# Altium PCB Tigershark 3D R1.4.PcbDoc (part 2 of 4)
Units mil, origin at the board's own origin, x right, y up, seen from the top; angles counter-clockwise.
Board outline 5500 x 4400 mil, 4 copper layers (Top Layer, Groun Plane, Power Plane, Bottom Layer); 262 components, 257 nets, 980 pads, 806 vias.
Unrouted connection lines stored in the file: 9.
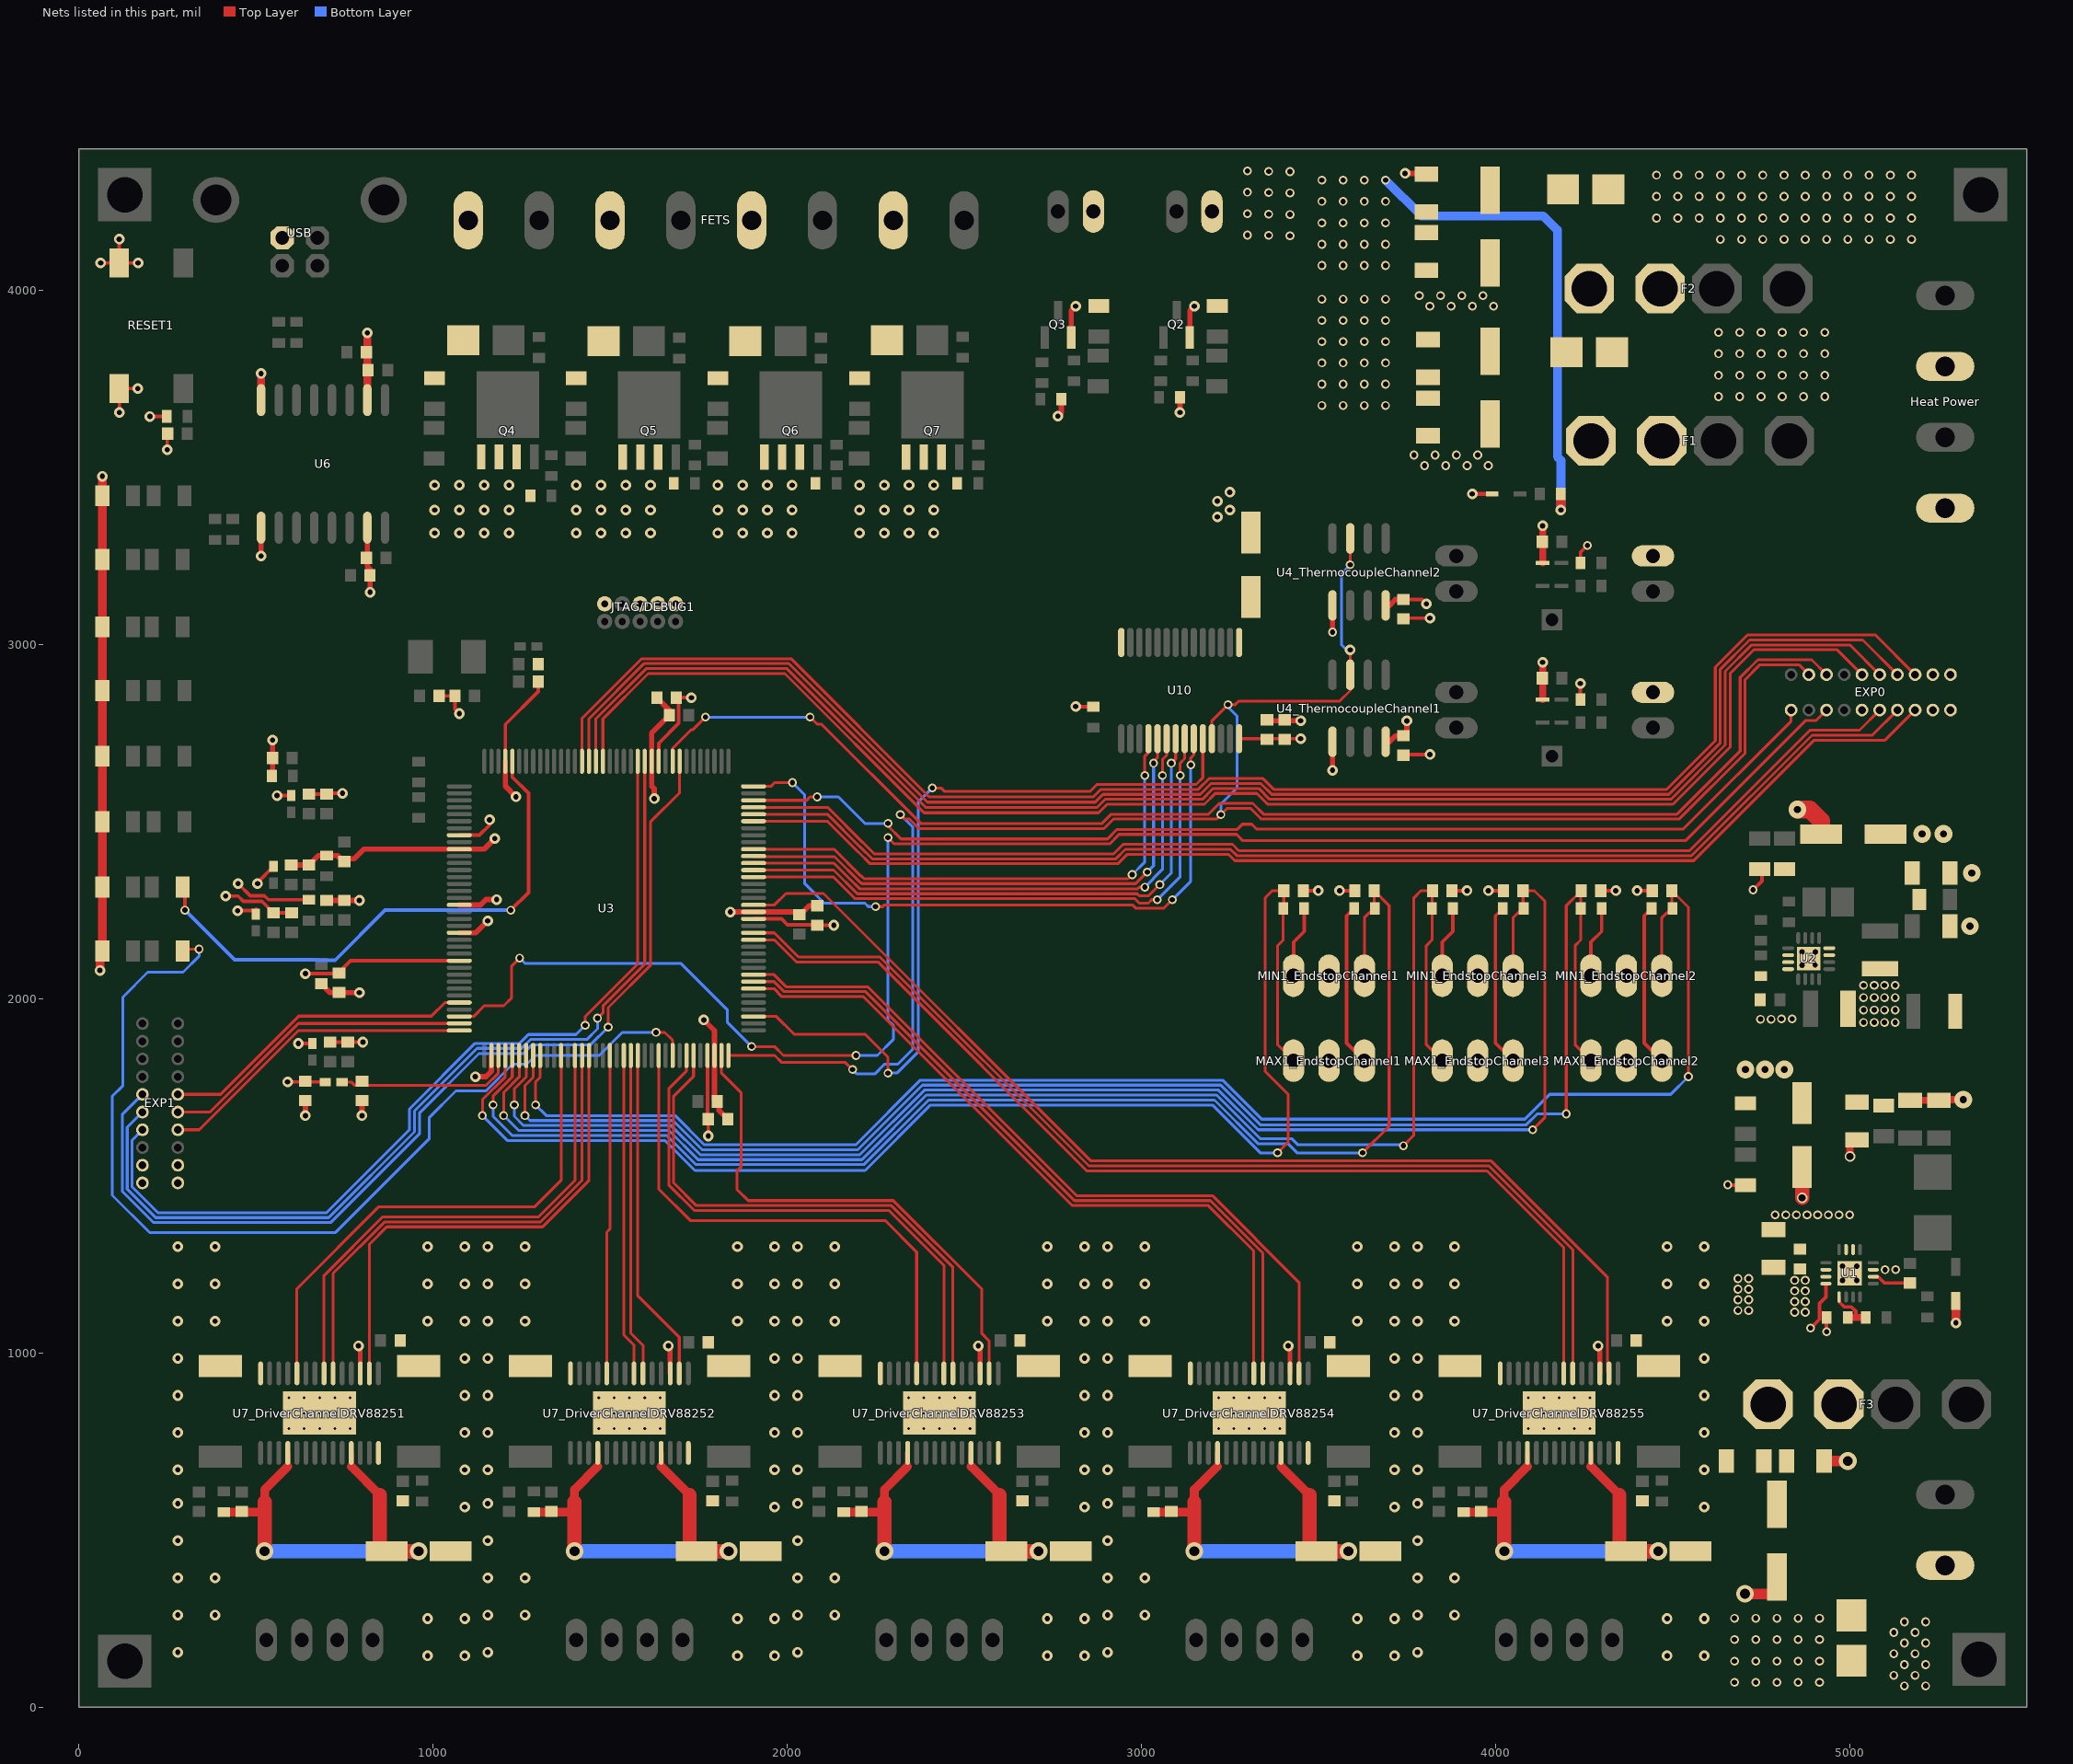
[diagram p4: the nets of this part, all layers, seen from the top]

## Part data
C1_EndstopChannel1 C1_EndstopChannel2 C1_EndstopChannel3 C2_EndstopChannel1 C2_EndstopChannel2 C2_EndstopChannel3 C4 C5 C6 C9 C13 C14 C15 C18 C19 C22 C23 C24 C25 C26 C27 C28 C29 C32 C33 C34 C35 C36 C37 C38 C39 C40 C41 C42 C43 C44 C45 C46 C47 C48 C52 C53 C54 C55 C56 C57 C58 C59 C60 C61 C64 C65 C66_DriverChannelDRV88251 C66_DriverChannelDRV88252 C66_DriverChannelDRV88253 C66_DriverChannelDRV88254 C66_DriverChannelDRV88255 C68_DriverChannelDRV88251 C68_DriverChannelDRV88252 C68_DriverChannelDRV88253 C68_DriverChannelDRV88254 C68_DriverChannelDRV88255 C71_DriverChannelDRV88251 C71_DriverChannelDRV88252 C71_DriverChannelDRV88253 C71_DriverChannelDRV88254 C71_DriverChannelDRV88255 C73 C75_DriverChannelDRV88251 C75_DriverChannelDRV88252 C75_DriverChannelDRV88253 C75_DriverChannelDRV88254 C75_DriverChannelDRV88255: library part "Cap Semi", "Capacitor (Semiconductor SIM Model)"
C3 C12 C16 C69_DriverChannelDRV88251 C69_DriverChannelDRV88252 C69_DriverChannelDRV88253 C69_DriverChannelDRV88254 C69_DriverChannelDRV88255: library part "Cap Pol1", "Polarized Capacitor (Radial)"
C7 C8 C10 C11 C30_ThermistorChannel1 C30_ThermistorChannel2 C31_ThermocoupleChannel1 C31_ThermocoupleChannel2 C63: "Capacitor (Semiconductor SIM Model)"
C17: library part Cap2, "Capacitor"
D1: library part "D Zener", "Zener Diode"
D2 D3 D7 D9 D20 D21 D22 D23 D24 D25: "Typical RED, GREEN, YELLOW, AMBER GaAs LED"
D4 D6 D8 D12 D15 D17 D19: library part "D Schottky", "Schottky Diode"
D5: "Default Diode"
D10 D11 D13 D14 D16 D18: "Typical RED GaAs LED"
D11_ThermistorChannel1 D11_ThermistorChannel2 D12_ThermistorChannel1 D12_ThermistorChannel2: "High Conductance Fast Diode"
F1 F2 F3 F4: library part "Fuse 1", "Fuse"
FB2 FB3 L2: library part Inductor, "Inductor"
FETS: library part con-phoenix-508
"Heat Power": library part con-phoenix-508_4
M1_DriverChannelDRV88251 M1_DriverChannelDRV88252 M1_DriverChannelDRV88253 M1_DriverChannelDRV88254 M1_DriverChannelDRV88255: library part "Molex 0705430003 Alt", "Molex 4 Pin Clip Connector"
MAX1_EndstopChannel1 MAX1_EndstopChannel2 MAX1_EndstopChannel3 MIN1_EndstopChannel1 MIN1_EndstopChannel2 MIN1_EndstopChannel3: library part "Molex Endstop"
"Motor Power": library part con-phoenix-508_2
Q2 Q3 Q4 Q5 Q6 Q7: "N-Channel MOSFET"
R1 R7 R8 R9 R10 R11 R13_ThermistorChannel1 R13_ThermistorChannel2 R14_ThermistorChannel1 R14_ThermistorChannel2 R17 R21: "Resistor"
R2_EndstopChannel1 R2_EndstopChannel2 R2_EndstopChannel3 R3_EndstopChannel1 R3_EndstopChannel2 R3_EndstopChannel3 R4 R5 R6 R12 R13 R14 R15 R16 R18 R19 R20 R22 R23 R28 R29 R30_DriverChannelDRV88251 R30_DriverChannelDRV88252 R30_DriverChannelDRV88253 R30_DriverChannelDRV88254 R30_DriverChannelDRV88255 R31_DriverChannelDRV88251 R31_DriverChannelDRV88252 R31_DriverChannelDRV88253 R31_DriverChannelDRV88254 R31_DriverChannelDRV88255 R32_DriverChannelDRV88251 R32_DriverChannelDRV88252 R32_DriverChannelDRV88253 R32_DriverChannelDRV88254 R32_DriverChannelDRV88255 R33_DriverChannelDRV88251 R33_DriverChannelDRV88252 R33_DriverChannelDRV88253 R33_DriverChannelDRV88254 R33_DriverChannelDRV88255 R34 R35 R36 R37 R38 R39 R40 R45 R46 R47 R48 R52 R55 R56 R57 R58 R59 R60 R61 R62 R63 R64 R65 R66 R67 R68 R69 R70 R71: library part Res3, "Resistor"
THM_TP1_ThermistorChannel1 THM_TP1_ThermistorChannel2: library part Socket, "Socket"
U2: "Buck Step Down Regulator with 3 to 17 V Input and 3.3 V Output, -40 to 85 degC, 16-Pin QFN (RGT), Green (RoHS & no Sb/Br)"
U4_ThermocoupleChannel1 U4_ThermocoupleChannel2: "Cold Junction Compensated Thermocouple to Digital Converter, 14 Bits Temperature Resolution, -40 to 125 degC, 8-Pin SOIC (S8+4), Pb-Free"
U6: "USB Opto Isolator"
U7_DriverChannelDRV88251 U7_DriverChannelDRV88252 U7_DriverChannelDRV88253 U7_DriverChannelDRV88254 U7_DriverChannelDRV88255: "DRV8825 Ti Stepper Driver"
U10: library part TPIC46IO1
X2: library part XTAL, "Crystal Oscillator"

## Free pads (board coordinates)
  rect 150x150 hole 100: ""(130,130) ""(130,4270) ""(5365,135) ""(5370,4270)

## Via types
v1: diameter 25, hole 15, Top Layer to Bottom Layer, 373 vias
v2: diameter 30, hole 15, Top Layer to Bottom Layer, 334 vias
v3: diameter 19.68, hole 7.87, Top Layer to Bottom Layer, 75 vias
v4: diameter 50, hole 28, Top Layer to Bottom Layer, 12 vias
v5: diameter 50, hole 20, Top Layer to Bottom Layer, 9 vias
v6: diameter 30, hole 20, Top Layer to Bottom Layer, 3 vias

## Nets (pads, with @x,y where several pads share a name; then routed paths per layer and width w, separated by ;. In a path a pad name is that pad's centre, name@x,y a point inside that pad or via, vN(x,y) a via of type N, cw(c..) or ccw(c..) an arc to the next point about the centre after c; other vN are vias at no path point)
3.3VCC: C23.1 C25.2 C26.1 C31_ThermocoupleChannel1.2 C31_ThermocoupleChannel2.2 C35.1 C45.2 C46.2 C47.2 C48.2 C64.2 EXP0.9 EXP0.12 EXP1.9 EXP1.12 FB3.2 FB5.1 FB6.1 FB7.1 FB8.1 FB9.1 JTAG/DEBUG1.1@1685,3115 MAX1_EndstopChannel1.3 MAX1_EndstopChannel2.3 MAX1_EndstopChannel3.3 MIN1_EndstopChannel1.3 MIN1_EndstopChannel2.3 MIN1_EndstopChannel3.3 R2_EndstopChannel1.1 R2_EndstopChannel2.1 R2_EndstopChannel3.1 R3_EndstopChannel1.1 R3_EndstopChannel2.1 R3_EndstopChannel3.1 R6.2 R11.2 R13_ThermistorChannel1.2 R13_ThermistorChannel2.2 R17.1 R21.2 U3.11 U3.62 U3.105 U3.125 U4_ThermocoupleChannel1.4 U4_ThermocoupleChannel2.4 U7_DriverChannelDRV88251.17 U7_DriverChannelDRV88252.17 U7_DriverChannelDRV88253.17 U7_DriverChannelDRV88254.17 U7_DriverChannelDRV88255.17 U10.14 | length 4673.6
  Top Layer w10: v2(201,3644) R21.2@248.47,3644 ; v2(449,2248.62) 501.22,2248.62 FB5.1@501.22,2252.8 ; v2(450,2325) 484,2291 524.19,2291 535.66,2279.53 R6.2@650,2279.53 ; v2(505,2325) 505,2328.62 FB7.1@550,2373.62 ; v2(560,2573.62) FB8.1@600,2573.62 ; v2(590,1765) FB9.1@696.38,1765 ; v2(620,1873.62) FB6.1@660,1873.62 ; v2(640,2070.81) 715,2070.81 ; C48.2@735,2072.56 735,2075 767.36,2107.36 U3.62@1074.65,2107.36 ; U3.11@1637.64,2670.35 1637.64,2721.18 1694.19,2777.73 1694.19,2843.37 C47.2@1687.56,2850 v2(1730,2850) ; C45.2@1775.43,1660 U3.105@1775.43,1839.65 ; v2(1777.44,1612.56) C45.2@1777.44,1660 ; U3.125@1905.35,2225.47 1984.53,2225.47 2000.81,2209.19 2083.25,2209.19 C46.2@2085,2207.44 v2(2132.44,2207.44) ; v2(2815,2825) 2815.47,2824.53 R17.1@2865,2824.53 ; U10.14@3276.34,2734.17 v2(3450,2734.17) ; MIN1_EndstopChannel1.3@3430,2065 3430,2160 3460,2190 R3_EndstopChannel1.1@3460,2255 ; R2_EndstopChannel1.1@3600.95,2255 3580,2234.06 3580,1875 MAX1_EndstopChannel1.3@3630,1825 ; C31_ThermocoupleChannel2.2@3755,3127.05 3792.95,3127.05 v2(3805,3115) ; MIN1_EndstopChannel3.3@3850,2065 3850,2160 3880,2190 R3_EndstopChannel3.1@3880,2255 ; R2_EndstopChannel3.1@4020.95,2255 4000,2234.06 4000,1875 MAX1_EndstopChannel3.3@4050,1825 ; v2(4240,2890) 4240,2845.47 R13_ThermistorChannel1.2@4240.47,2845 ; R13_ThermistorChannel2.2@4240.47,3230 4240.47,3260.47 v1(4260,3280) ; MIN1_EndstopChannel2.3@4270,2065 4270,2160 4300,2190 R3_EndstopChannel2.1@4300,2255 ; R2_EndstopChannel2.1@4440.95,2255 4420,2234.06 4420,1875 MAX1_EndstopChannel2.3@4470,1825
  Top Layer w14: v2(790,1020) 795,1020 U7_DriverChannelDRV88251.17@795,942.36 ; v2(1665,1020) 1670,1020 U7_DriverChannelDRV88252.17@1670,942.36 ; v2(2540,1020) 2545,1020 U7_DriverChannelDRV88253.17@2545,942.36 ; v2(3415,1020) 3420,1020 U7_DriverChannelDRV88254.17@3420,942.36 ; v2(4290,1020) 4295,1020 U7_DriverChannelDRV88255.17@4295,942.36
  Top Layer w15: U4_ThermocoupleChannel1.4@3690,2725.51 3701.02,2725.51 3717.56,2742.05 3750,2742.05 v2(3750,2784.49) ; U4_ThermocoupleChannel2.4@3690,3110.51 3701.02,3110.51 3717.56,3127.05 C31_ThermocoupleChannel2.2@3750,3127.05
  other v5: 5205,2465 5265,2465
+5VCC: C9.1 C34.1 F4.2 FB2.2 R8.2
  other v5: 4706,1800 4761,1800 4816,1800
+12VCC1: C10.2 C11.2 C16.1 C18.2 C19.2 C66_DriverChannelDRV88251.1 C66_DriverChannelDRV88252.1 C66_DriverChannelDRV88253.1 C66_DriverChannelDRV88254.1 C66_DriverChannelDRV88255.1 C69_DriverChannelDRV88251.1 C69_DriverChannelDRV88252.1 C69_DriverChannelDRV88253.1 C69_DriverChannelDRV88254.1 C69_DriverChannelDRV88255.1 D8.2 F3.2 R30_DriverChannelDRV88251.1 R30_DriverChannelDRV88252.1 R30_DriverChannelDRV88253.1 R30_DriverChannelDRV88254.1 R30_DriverChannelDRV88255.1 U1.2 U1.3 U1.11 U7_DriverChannelDRV88251.4 U7_DriverChannelDRV88251.11 U7_DriverChannelDRV88252.4 U7_DriverChannelDRV88252.11 U7_DriverChannelDRV88253.4 U7_DriverChannelDRV88253.11 U7_DriverChannelDRV88254.4 U7_DriverChannelDRV88254.11 U7_DriverChannelDRV88255.4 U7_DriverChannelDRV88255.11 | length 6255.1
  Top Layer w14: 590.43,679.43 U7_DriverChannelDRV88251.4@590.43,717.8 ; 769.57,679.43 U7_DriverChannelDRV88251.11@769.57,717.8 ; 1465.43,679.43 U7_DriverChannelDRV88252.4@1465.43,717.8 ; 1644.57,679.43 U7_DriverChannelDRV88252.11@1644.57,717.8 ; 2340.43,679.43 U7_DriverChannelDRV88253.4@2340.43,717.8 ; 2519.57,679.43 U7_DriverChannelDRV88253.11@2519.57,717.8 ; 3215.43,679.43 U7_DriverChannelDRV88254.4@3215.43,717.8 ; 3394.57,679.43 U7_DriverChannelDRV88254.11@3394.57,717.8 ; 4090.43,679.43 U7_DriverChannelDRV88255.4@4090.43,717.8 ; 4269.57,679.43 U7_DriverChannelDRV88255.11@4269.57,717.8
  Top Layer w25: R30_DriverChannelDRV88251.1@410,550.47 525,550.47 ; 525,580 525,614 590.43,679.43 ; 769.57,679.43 850,599 ; R30_DriverChannelDRV88252.1@1285,550.47 1400,550.47 ; 1400,580 1400,614 1465.43,679.43 ; 1644.57,679.43 1725,599 ; R30_DriverChannelDRV88253.1@2160,550.47 2275,550.47 ; 2275,580 2275,614 2340.43,679.43 ; 2519.57,679.43 2600,599 ; R30_DriverChannelDRV88254.1@3035,550.47 3150,550.47 ; 3150,580 3150,614 3215.43,679.43 ; 3394.57,679.43 3475,599 ; R30_DriverChannelDRV88255.1@3910,550.47 4025,550.47 ; 4025,580 4025,614 4090.43,679.43 ; 4269.57,679.43 4350,599
  Top Layer w40: v4(525,440) 525,580 ; C69_DriverChannelDRV88251.1@850,440.55 850,599 ; C69_DriverChannelDRV88251.1@869.45,440 v4(960,440) ; v4(1400,440) 1400,580 ; C69_DriverChannelDRV88252.1@1725,440.55 1725,599 ; C69_DriverChannelDRV88252.1@1744.45,440 v4(1835,440) ; v4(2275,440) 2275,580 ; C69_DriverChannelDRV88253.1@2600,440.55 2600,599 ; C69_DriverChannelDRV88253.1@2619.45,440 v4(2710,440) ; v4(3150,440) 3150,580 ; C69_DriverChannelDRV88254.1@3475,440.55 3475,599 ; C69_DriverChannelDRV88254.1@3494.45,440 v4(3585,440) ; v4(4025,440) 4025,580 ; C69_DriverChannelDRV88255.1@4350,440.55 4350,599 ; C69_DriverChannelDRV88255.1@4369.45,440 v4(4460,440)
  Bottom Layer w40: v4@530,440 v4(960,440) ; v4@1405,440 v4(1835,440) ; v4@2280,440 v4(2710,440) ; v4@3155,440 v4(3585,440) ; v4@4030,440 v4(4460,440)
  other v1: 4675,70 4735,70 4795,70 4855,70 4915,70 4675,130 4735,130 4795,130 4855,130 4915,130 4675,191 4735,191 4795,191 4855,191 4915,191 4675,251 4735,251 4795,251 4855,251 4915,251 4845,1115 4875,1115 4685,1120 4715,1120 4845,1145 4875,1145 4685,1150 4715,1150 4845,1175 4875,1175 4685,1180 4715,1180 4845,1205 4875,1205 4685,1210 4715,1210 5100,1234.84 5130,1235
+12VCC2: C3.1 C5.2 C6.2 C17.1 D4.2 D15.2 D17.2 D19.2 F2.2 FAN-1.1 FAN-2.1 FETS.3 FETS.5 FETS.7 R1.2 R13.1 R47.1 R60.2 R64.2 R68.2 U10.28 | length 1382.7
  Top Layer w8: R1.2@4184.53,3425 R1.2@4185,3424.53
  Top Layer w25: v2(4185,3380) R1.2@4185,3424.53
  Bottom Layer w25: v1(3690,4311) 3791,4210 4135,4210 4175,4170 4175,3530 4185,3520 v2(4185,3380)
  other v1: 3510,4070 3570,4070 3630,4070 3690,4070 3510,4130 3570,4130 3630,4130 3690,4130 3420,4154 3360,4155 3300,4156 3510,4190 3570,4190 3630,4190 3690,4190 3420,4214 3360,4215 3300,4216 3510,4251 3570,4251 3630,4251 3690,4251 3420,4275 3360,4276 3300,4277 3510,4311 3570,4311 3630,4311 3420,4335 3360,4336 3300,4337
+12VCC3: C12.1 C14.2 C15.2 D6.2 D12.2 F1.2 FETS.1 R56.2
  other v1: 3510,3675 3570,3675 3630,3675 3690,3675 3510,3735 3570,3735 3630,3735 3690,3735 3510,3795 3570,3795 3630,3795 3690,3795 3510,3855 3570,3855 3630,3855 3690,3855 3510,3915 3570,3915 3630,3915 3690,3915 3510,3975 3570,3975 3630,3975 3690,3975
AVREF: C65.2 FB9.2 U3.75 | length 509.5
  Top Layer w8: FB9.2@743.62,1765 770,1765 780,1755 1149.75,1755 1184.88,1790.13 U3.75@1184.88,1839.65
BED_PWM: U3.144 U10.9 | length 1973.4
  Top Layer w8: U3.144@1905.35,2599.49 1954.49,2599.49 1965,2610 v1(2015,2610) ; v1(2250,2260) 2270,2260 2275,2265 2975,2265 2984,2256 3064.14,2256 v1(3087.78,2279.64) ; v1(3140,2660) 3140,2680 3148.39,2688.39 U10.9@3148.39,2734.17
  Bottom Layer w8: v1(2015,2610) 2050,2575 2050,2325 2105,2270 2220,2270 2230,2260 v1(2250,2260) ; v1(3087.78,2279.64) 3140,2331.86 v1(3140,2660)
BST: C7.2 U1.10 | length 110.4
  Top Layer w10: U1.10@5066.93,1215.16 5080.59,1215.16 5098.3,1197.44 C7.2@5170,1197.44
CS_FET: U3.111 U10.10 | length 2238.1
  Top Layer w8: U3.111@1905.35,1949.88 1970.12,1949.88 2020,1900 2220,1900 2285,1835 v1(2285,1790) ; v1(2410,2595) 2435,2595 2445,2585 2855,2585 2875,2605 3155,2605 3173.98,2623.98 U10.10@3173.98,2734.17
  Bottom Layer w8: v1(2285,1790) 2310,1790 2370,1850 2370,2555 v1(2410,2595)
DIR1: U3.87 U7_DriverChannelDRV88251.20 | length 1446.3
  Top Layer w8: U7_DriverChannelDRV88251.20@718.39,942.2 718.39,1224.39 863.99,1370 1303.99,1370 1421,1487.01 1421,1839.54 U3.87@1421.1,1839.65
DIR2: U3.94 U7_DriverChannelDRV88252.20 | length 911.7
  Top Layer w8: U3.94@1558.9,1839.65 1558.9,1056.1 1593.39,1021.61 U7_DriverChannelDRV88252.20@1593.39,942.2
DIR3: U3.103 U7_DriverChannelDRV88253.20 | length 1569.5
  Top Layer w8: U3.103@1736.06,1839.65 1736.06,1781.06 1680,1725 1680,1480 1744,1416 2294.2,1416 2468.39,1241.82 U7_DriverChannelDRV88253.20@2468.39,942.2
DIR4: U3.116 U7_DriverChannelDRV88254.20 | length 2095.1
  Top Layer w8: U3.116@1905.35,2048.31 1963.1,2048.31 1991.53,2019.88 2221.73,2019.88 2811.61,1430 3195.2,1430 3343.39,1281.82 U7_DriverChannelDRV88254.20@3343.39,942.2
DIR5: U3.123 U7_DriverChannelDRV88255.20 | length 3033.1
  Top Layer w8: U3.123@1905.35,2186.1 1964.1,2186.1 2032.32,2117.88 2262.32,2117.88 2852.2,1528 3982.2,1528 4218.39,1291.82 U7_DriverChannelDRV88255.20@4218.39,942.2
DIR_EXP1: EXP1.6 U3.13 | length 2662.4
  Top Layer w8: v1(1465,1945) 1481,1961 1481,1980.8 1598.27,2098.07 U3.13@1598.27,2670.35
  Bottom Layer w8: EXP1.6@180,1680 137,1637 137,1462.4 217.4,1382 705.75,1382 948,1624.25 948,1682.95 1125.05,1860 1250.6,1860 1275.6,1885 1435,1885 1465,1915 v1(1465,1945)
DIR_EXP2: EXP1.15 U3.71 | length 898.3
  Top Layer w8: EXP1.15@280,1680 370.4,1680 620.6,1930.2 U3.71@1074.65,1930.2
DRV_RESET1: U3.88 U7_DriverChannelDRV88251.16 | length 1412
  Top Layer w8: U7_DriverChannelDRV88251.16@820.75,942.2 820.75,1306.95 869.79,1356 1309.79,1356 1440.79,1486.99 U3.88@1440.79,1839.65
DRV_RESET2: U3.95 U7_DriverChannelDRV88252.16 | length 946
  Top Layer w8: U3.95@1578.58,1839.65 1578.58,1161.42 1695.75,1044.25 U7_DriverChannelDRV88252.16@1695.75,942.2
DRV_RESET3: U3.107 U7_DriverChannelDRV88253.16 | length 1460.1
  Top Layer w8: U3.107@1814.8,1839.65 1814.8,1790.2 1870,1735 1870,1524.6 1858.5,1513.1 1858.5,1461.7 1890.2,1430 2300,1430 2550,1180 2550,1055 2570.75,1034.25 U7_DriverChannelDRV88253.16@2570.75,942.2
DRV_RESET4: U3.117 U7_DriverChannelDRV88254.16 | length 2157.3
  Top Layer w8: U3.117@1905.35,2067.99 1963.21,2067.99 1997.32,2033.88 2227.53,2033.88 2817.41,1444 3201,1444 3445.75,1199.25 U7_DriverChannelDRV88254.16@3445.75,942.2
DRV_RESET5: U3.127 U7_DriverChannelDRV88255.16 | length 3146.5
  Top Layer w8: U3.127@1905.35,2264.84 1964.84,2264.84 1997.23,2297.23 2102.77,2297.23 2858,1542 3988,1542 4316.69,1213.31 4316.69,946.26 U7_DriverChannelDRV88255.16@4320.75,942.2
DRV_RESET_EXP1: EXP1.7 U3.14 | length 2543.1
  Top Layer w8: v1(1430,1925) 1430,1949.6 1578.58,2098.18 U3.14@1578.58,2670.35
  Bottom Layer w8: EXP1.7@180,1630 151,1601 151,1468.2 223.2,1396 699.95,1396 934,1630.05 934,1688.75 1119.25,1874 1244.8,1874 1269.8,1899 1404,1899 v1(1430,1925)
DRV_RESET_EXP2: EXP1.14 U3.72 | length 910.8
  Top Layer w8: EXP1.14@280,1630 340.2,1630 620.71,1910.51 U3.72@1074.65,1910.51
EN1: U3.86 U7_DriverChannelDRV88251.21 | length 1448.7
  Top Layer w8: U7_DriverChannelDRV88251.21@692.8,942.2 692.8,1218.6 858.2,1384 1298.2,1384 1401.42,1487.22 U3.86@1401.42,1839.65
EN2: U3.93 U7_DriverChannelDRV88252.21 | length 909.3
  Top Layer w8: U3.93@1539.21,1839.65 1539.21,1050.79 1567.8,1022.2 U7_DriverChannelDRV88252.21@1567.8,942.2
EN3: U3.102 U7_DriverChannelDRV88253.21 | length 1562.4
  Top Layer w8: U3.102@1716.38,1839.65 1716.38,1796.38 1666,1746 1666,1474.2 1738.2,1402 2288.4,1402 2442.8,1247.61 U7_DriverChannelDRV88253.21@2442.8,942.2
EN4: U3.115 U7_DriverChannelDRV88254.21 | length 2064.8
  Top Layer w8: U3.115@1905.35,2028.62 1962.99,2028.62 1985.73,2005.88 2215.93,2005.88 2805.81,1416 3189.4,1416 3317.8,1287.61 U7_DriverChannelDRV88254.21@3317.8,942.2
EN5: U3.122 U7_DriverChannelDRV88255.21 | length 3002.7
  Top Layer w8: U3.122@1905.35,2166.42 1963.78,2166.42 2026.32,2103.88 2256.52,2103.88 2846.4,1514 3976.4,1514 4192.8,1297.61 U7_DriverChannelDRV88255.21@4192.8,942.2
EN_EXP1: EXP1.5 U3.8 | length 2802.6
  Top Layer w8: v1(1495,1920) 1495,1975 1615,2095 1615,2500 1696.69,2581.69 U3.8@1696.69,2670.35
  Bottom Layer w8: EXP1.5@180,1730 123,1673 123,1456.6 211.6,1368 711.55,1368 962,1618.45 962,1677.15 1129.85,1845 1255.4,1845 1280.4,1870 1445,1870 v1(1495,1920)
EN_EXP2: EXP1.16 U3.68 | length 902
  Top Layer w8: EXP1.16@280,1730 400.6,1730 621.6,1951 996,1951 1034.25,1989.25 U3.68@1074.65,1989.25
EXP_CS: EXP0.1 U3.142 | length 3167.3
  Top Layer w8: U3.142@1905.35,2560.12 2055.12,2560.12 2065,2570 v1(2085,2570) ; v1(2285,2495) 2285,2488.18 2322.18,2451 2904.88,2451 2931.8,2477.93 3271.11,2477.93 3285.68,2492.5 3312.3,2492.5 3325.8,2479 4530.21,2479 4835,2783.79 EXP0.1@4835,2815
  Bottom Layer w8: v1(2085,2570) 2145,2570 2220,2495 v1(2285,2495)
EXP_INTERRUP1: EXP0.16 U3.19 | length 4256.9
  Top Layer w8: U3.19@1480.16,2670.35 1480.16,2790.16 1608,2918 1994.02,2918 2387.02,2525 2879.88,2525 2903.88,2549 3178.4,2549 3208.9,2579.5 3326.31,2579.5 3356.81,2549 4501.21,2549 4663,2710.79 4663,2918.6 4729.4,2985 4965,2985 EXP0.16@5035,2915
EXP_INTERRUP2: EXP0.15 U3.20 | length 4337.6
  Top Layer w8: U3.20@1460.47,2670.35 1460.47,2790.47 1602,2932 1999.81,2932 2391.81,2540 2875,2540 2898,2563 3172.6,2563 3203.1,2593.5 3332.11,2593.5 3362.61,2563 4495.41,2563 4649,2716.59 4649,2924.4 4723.6,2999 5001,2999 EXP0.15@5085,2915
EXP_SYNC: EXP0.6 U3.141 | length 3417.1
  Top Layer w8: U3.141@1905.35,2540.43 2114.57,2540.43 2213,2442 2213.2,2442 2246.2,2409 2922.27,2409 2949.2,2435.93 3257.66,2435.93 3275.58,2418 4548.4,2418 4888.4,2758 5028,2758 EXP0.6@5085,2815
EXT0_LED: R34.2 U3.32 | length 1564.6
  Top Layer w10: R34.2@293.31,2315 300,2308.31 v1(300,2250) ; v1(1220,2250) 1270,2300 1270,2580 1224.25,2625.75 U3.32@1224.25,2670.35
  Bottom Layer w10: v1(300,2250) 440,2110 673.23,2110 674.23,2109 724,2109 865,2250 v1(1220,2250)
EXT1_LED: R29.2 U3.100 | length 2843.9
  Top Layer w8: R29.2@298.31,2140 v1(340,2140) ; v1(1630,1905) 1655,1905 1677.01,1882.99 U3.100@1677.01,1839.65
  Bottom Layer w8: v1(340,2140) 340,2120 295,2075 195,2075 125,2005 125,1755 95,1725 95,1445 200,1340 725,1340 990,1605 990,1665 1065,1740 1150,1740 1225,1815 1265,1815 1290,1840 1470,1840 1535,1905 v1(1630,1905)
FB: R7.1 R10.2 U1.5 | length 134.9
  Top Layer w10: U1.5@4970.47,1158.07 4970.47,1144.41 4984.89,1130 5005,1130 5017.74,1117.26 5017.74,1100
  Top Layer w20: R10.2@4995,1100 R7.1@5040.47,1100
FET_PWM1: U3.135 U10.4 | length 1511.3
  Top Layer w8: U3.135@1905.35,2422.32 2132.68,2422.32 2209,2346 2210.21,2346 2217.21,2339 2963.29,2339 v1(2974.64,2350.36) ; v1(3010,2630) 3010,2685 3020.43,2695.43 U10.4@3020.43,2734.17
  Bottom Layer w8: v1(2974.64,2350.36) 3010,2385.71 v1(3010,2630)
FET_PWM2: U3.134 U10.5 | length 1546
  Top Layer w8: U3.134@1905.35,2402.64 1906.99,2401 2134.2,2401 2207.2,2328 2208.41,2328 2211.41,2325 2984.64,2325 v1(3017.07,2357.43) ; v1(3035,2665) 3035,2669.8 3046.02,2680.82 U10.5@3046.02,2734.17
  Bottom Layer w8: v1(3017.07,2357.43) 3035,2375.36 v1(3035,2665)
FET_PWM3: U3.133 U10.6 | length 1581.2
  Top Layer w8: U3.133@1905.35,2382.95 2132.05,2382.95 2175,2340 2175.4,2340 2204.9,2310.5 2989.94,2310.5 2994.44,2315 v1(3010,2315) ; v1(3060,2630) 3060,2675 3071.61,2686.61 U10.6@3071.61,2734.17
  Bottom Layer w8: v1(3010,2315) 3060,2365 v1(3060,2630)
FET_PWM4: U3.132 U10.7 | length 1620.6
  Top Layer w8: U3.132@1905.35,2363.27 2033.27,2363.27 2033.31,2363.31 2131.71,2363.31 2198.52,2296.5 2988.3,2296.5 2989.3,2295.5 2989.5,2295.5 2994,2291 3021.2,2291 3052.27,2322.07 v1(3052.43,2322.07) ; v1(3085,2665) 3097.2,2677.2 U10.7@3097.2,2734.17
  Bottom Layer w8: v1(3052.43,2322.07) 3085,2354.64 v1(3085,2665)
FET_PWM5: U3.131 U10.8 | length 1661.1
  Top Layer w8: U3.131@1905.35,2343.58 2131.64,2343.58 2192.72,2282.5 2982.5,2282.5 2995,2270 3020,2270 3029.64,2279.64 v1(3045.36,2279.64) ; v1(3110,2630) 3110,2665 3122.8,2677.8 U10.8@3122.8,2734.17
  Bottom Layer w8: v1(3045.36,2279.64) 3110,2344.29 v1(3110,2630)
GND: "Heat Power.2" "Heat Power.4" "Motor Power.2" C1_EndstopChannel1.2 C1_EndstopChannel2.2 C1_EndstopChannel3.2 C2_EndstopChannel1.2 C2_EndstopChannel2.2 C2_EndstopChannel3.2 C3.2 C4.2 C5.1 C6.1 C8.1 C9.2 C10.1 C11.1 C12.2 C13.1 C14.1 C15.1 C16.2 C17.2 C18.1 C19.1 C22.2 C23.2 C24.1 C25.1 C26.2 C27.1 C28.1 C29.2 C30_ThermistorChannel1.1 C30_ThermistorChannel2.1 C31_ThermocoupleChannel1.1 C31_ThermocoupleChannel2.1 C32.1 C33.1 C34.2 C35.2 C36.1 C37.1 C38.1 C39.1 C40.1 C41.1 C42.1 C43.1 C44.1 C45.1 C46.1 C47.1 C48.1 C52.2 C53.1 C54.1 C55.1 C56.1 C57.1 C60.1 C61.1 C63.1 C64.1 C65.1 C69_DriverChannelDRV88251.2 C69_DriverChannelDRV88252.2 C69_DriverChannelDRV88253.2 C69_DriverChannelDRV88254.2 C69_DriverChannelDRV88255.2 C71_DriverChannelDRV88251.1 C71_DriverChannelDRV88252.1 C71_DriverChannelDRV88253.1 C71_DriverChannelDRV88254.1 C71_DriverChannelDRV88255.1 C73.1 C75_DriverChannelDRV88251.1 C75_DriverChannelDRV88252.1 C75_DriverChannelDRV88253.1 C75_DriverChannelDRV88254.1 C75_DriverChannelDRV88255.1 D1.1 D2.2 D3.2 D4.1 D5.1 D6.1 D7.1 D8.1 D9.1 D12_ThermistorChannel1.1 D12_ThermistorChannel2.1 D20.2 D21.2 D22.2 D23.2 D24.2 D25.2 EXP0.10 EXP0.11 EXP1.10 EXP1.11 JTAG/DEBUG1.3 JTAG/DEBUG1.5 JTAG/DEBUG1.9 MAX1_EndstopChannel1.2 MAX1_EndstopChannel2.2 MAX1_EndstopChannel3.2 MIN1_EndstopChannel1.2 MIN1_EndstopChannel2.2 MIN1_EndstopChannel3.2 P2_ThermistorChannel1.2 P2_ThermistorChannel2.2 Q2.2 Q3.2 Q4.1 Q4.2 Q4.3 Q5.1 Q5.2 Q5.3 Q6.1 Q6.2 Q6.3 Q7.1 Q7.2 Q7.3 R4.2 R10.1 R23.1 R32_DriverChannelDRV88251.1 R32_DriverChannelDRV88252.1 R32_DriverChannelDRV88253.1 R32_DriverChannelDRV88254.1 R32_DriverChannelDRV88255.1 R33_DriverChannelDRV88251.1 R33_DriverChannelDRV88252.1 R33_DriverChannelDRV88253.1 R33_DriverChannelDRV88254.1 R33_DriverChannelDRV88255.1 R38.1 R46.2 R55.2 R59.2 R63.2 R67.2 R71.2 RESET1.2 U1.4 U1.14 U1.15 U1.17 U2.6 U2.7 U2.8 U2.15 U2.16 U2.17 U3.12 U3.33 U3.44 U3.46 U3.54 U3.58 U3.74 U3.106 U3.126 U4_ThermocoupleChannel1.1 U4_ThermocoupleChannel2.1 U6.9 U6.15 U7_DriverChannelDRV88251.14 U7_DriverChannelDRV88251.28 U7_DriverChannelDRV88251.29 U7_DriverChannelDRV88252.14 U7_DriverChannelDRV88252.28 U7_DriverChannelDRV88252.29 U7_DriverChannelDRV88253.14 U7_DriverChannelDRV88253.28 U7_DriverChannelDRV88253.29 U7_DriverChannelDRV88254.14 U7_DriverChannelDRV88254.28 U7_DriverChannelDRV88254.29 U7_DriverChannelDRV88255.14 U7_DriverChannelDRV88255.28 U7_DriverChannelDRV88255.29 U10.15 | length 7329
  Top Layer w10: v2(62.17,4077.17) RESET1.2@114.45,4077.17 ; v2(114.45,4144.45) RESET1.2@114.45,4077.17 ; v2(115,3655) 115,3722.28 RESET1.2@114.45,3722.83 v2(167.17,3722.83) ; v2(167.83,4077.17) RESET1.2@114.45,4077.17 ; v2(250,3550) 250,3593.56 C63.1@251.44,3595 ; v2(415,2290) 450,2290 465,2275 517.56,2275 C55.1@550,2242.56 C54.1@601.22,2242.56 ; C61.1@650,2577.56 C60.1@700,2577.56 702.44,2580 v2(745,2580) ; C27.1@710,1877.56 C13.1@760,1877.56 v2(802.44,1877.56) ; C43.1@1017.56,2855 C44.1@1062.44,2855 1062.44,2817.56 v2(1075,2805) ; U3.44@1074.65,2461.69 1131.69,2461.69 1160,2490 v2(1160,2505) ; U3.33@1204.57,2670.35 1204.57,2774.57 1297.56,2867.56 C33.1@1297.56,2895 ; C2_EndstopChannel1.2@3457.56,2305 v2(3500,2305) ; v2(3560,2305) C1_EndstopChannel1.2@3602.91,2305 ; C31_ThermocoupleChannel1.1@3757.56,2689.49 v2(3815,2689.49) ; C31_ThermocoupleChannel2.1@3757.56,3074.49 v2(3815,3074.49) ; C5.1@3803.15,4330 C5.1@3805,4328.15 ; C2_EndstopChannel3.2@3877.56,2305 v2(3920,2305) ; v2(3980,2305) C1_EndstopChannel3.2@4022.91,2305 ; C2_EndstopChannel2.2@4297.56,2305 v2(4340,2305) ; v2(4400,2305) C1_EndstopChannel2.2@4442.91,2305 ; v1@4657.62,1473.38 D7.1@4706,1473.38 ; v1(4727.55,2307.45) 4752.55,2332.45 4752.55,2359.3 D9.1@4746.06,2365.79 ; v1(4890,1070) 4915,1095 4915,1140 4933.07,1158.07 U1.4@4933.07,1195.47 ; v1(4935,1060) R10.1@4935,1099.53
  Top Layer w12: v2(3934.53,3425) D1.1@3990.63,3425
  Top Layer w15: v2(515,3250) U6.9@515,3329.88 ; R23.1@547.44,2630.75 v2(547.44,2730) ; C28.1@600,2377.56 C53.1@650,2377.56 676.97,2404.53 R4.2@700,2404.53 730.47,2404.53 740,2395 778.23,2395 805.55,2422.32 U3.46@1074.65,2422.32 1144.84,2422.32 v2(1175,2452.48) ; v2(640,1670) C64.1@640,1712.44 ; C42.1@685,2042.44 710,2017.44 C48.1@735,2017.44 v2(792.56,2017.44) ; C37.1@700,2277.56 C36.1@750,2277.56 v2(792.44,2277.56) ; v2(800,1670) C65.1@800,1712.44 ; U6.15@815,3329.88 815,3220 822.56,3212.44 C56.1@822.56,3195 v2(822.56,3147.56) ; U3.58@1074.65,2186.1 1121.1,2186.1 v2(1155,2220) ; U3.54@1074.65,2264.84 1134.84,2264.84 1150,2280 v2(1180,2280) ; v2(1120,1780) 1150,1780 1165.2,1795.2 U3.74@1165.2,1839.65 ; U3.33@1204.57,2670.35 1204.57,2600.16 v2(1234.72,2570) ; v2(1625,2565) 1625,2593.11 1617.95,2600.16 U3.12@1617.95,2670.35 1617.95,2750.51 C38.1@1667.44,2800 1667.44,2815 C47.1@1632.44,2850 ; v2(1764.96,1940) 1795.12,1909.84 U3.106@1795.12,1839.65 1795.12,1715.13 1808.07,1702.18 1808.07,1684.92 C45.1@1832.99,1660 ; v2@1835.16,2245.16 U3.126@1905.35,2245.16 2045.16,2245.16 2062.56,2262.56 C46.1@2085,2262.56 ; v2(2765,3645) 2774.53,3654.53 R55.2@2774.53,3692.58 ; Q3.2@2802.4,3867.14 2802.4,3942.4 v2(2815,3955) ; v2(3109.53,3655) R46.2@3109.53,3697.58 ; Q2.2@3137.4,3867.14 3137.4,3942.4 v2(3150,3955) ; C26.2@3357.56,2785 v2(3450,2785) ; v2(3540,2645) U4_ThermocoupleChannel1.1@3540,2725.51 ; v1(3540,3035) U4_ThermocoupleChannel2.1@3540,3110.51 ; v2(3745,4330) C5.1@3803.15,4330
  Top Layer w20: D12_ThermistorChannel1.1@4133.43,2845 v2(4133.43,2950) ; D12_ThermistorChannel2.1@4133.43,3230 v2(4133.43,3335) ; v6(5001,1555) C34.2@5001,1601.85 ; C29.2@5171,1713.15 C8.1@5252,1713.15 ; C8.1@5253.85,1715 v5(5321,1715)
  Top Layer w25: v2(60,2080) D20.2@60,2128.31 ; D20.2@66.69,2135 D21.2@66.69,2315 D22.2@66.69,2500 D23.2@66.69,2685 D24.2@66.69,2870 D2.2@66.69,3050 D3.2@66.69,3240 v2(66.69,3475) ; v2(5300,1085) D5.1@5300,1146.77
  Top Layer w30: v4(4705,320) 4795,320 C16.2@4795,367.64 ; C19.1@4928.15,695 v4(4995,695)
  Top Layer w40: v6(4866,1438.15) C9.2@4866,1485
  Top Layer w50: v5(4852.55,2534.27) 4887.55,2534.27 4920,2501.82 C23.2@4920,2465
  other v1: 5155,60 5215,60 5125,90 5185,90 5155,120 5215,120 5125,151 5185,151 5155,181 5215,181 5125,211 5185,211 5155,241 5215,241 4980,1205 5020,1205 4980,1245 5020,1245 4790,1390 4820,1390 4850,1390 4880,1390 4910,1390 4940,1390 4970,1390 5000,1390 4656.01,1475 5039.55,1933.18 5069.55,1933.18 5098.55,1933.18 5128.55,1933.18 4748.55,1942.18 4778.55,1942.18 4807.55,1943.18 4837.55,1943.18 5039.55,1968.18 5069.55,1968.18 5098.55,1968.18 5128.55,1968.18 5039.55,2003.18 5069.55,2003.18 5098.55,2003.18 5128.55,2003.18 5039.55,2038.18 5069.55,2038.18 5098.55,2038.18 5128.55,2038.18 4865.55,2094.18 4902.55,2095.18 4865.55,2132.18 4903.55,2132.18 3800,3505 3860,3505 3920,3505 3980,3505 3770,3535 3830,3535 3890,3535 3950,3535 4630,3700 4690,3700 4750,3700 4810,3700 4870,3700 4930,3700 4630,3760 4690,3760 4750,3760 4810,3760 4870,3760 4930,3760 4630,3821 4690,3821 4750,3821 4810,3821 4870,3821 4930,3821 4630,3881 4690,3881 4750,3881 4810,3881 4870,3881 4930,3881 3815,3955 3875,3955 3935,3955 3995,3955 3785,3985 3845,3985 3905,3985 3965,3985 4635,4144 4695,4144 4755,4144 4815,4144 4875,4144 4935,4144 4995,4144 5055,4144 5115,4144 5175,4144 4455,4204 4515,4204 4575,4204 4635,4204 4695,4204 4755,4204 4815,4204 4875,4204 4935,4204 4995,4204 5055,4204 5115,4204 5175,4204 4455,4265 4515,4265 4575,4265 4635,4265 4695,4265 4755,4265 4815,4265 4875,4265 4935,4265 4995,4265 5055,4265 5115,4265 5175,4265 4455,4325 4515,4325 4575,4325 4635,4325 4695,4325 4755,4325 4815,4325 4875,4325 4935,4325 4995,4325 5055,4325 5115,4325 5175,4325
  other v2: 985,145 1090,145 1860,145 1965,145 2735,145 2840,145 3610,145 3715,145 4485,145 4590,145 280,155 1155,155 2030,155 2905,155 3780,155 985,250 1090,250 1860,250 1965,250 2735,250 2840,250 3610,250 3715,250 4485,250 4590,250 280,260 385,260 1155,260 1260,260 2030,260 2135,260 2905,260 3010,260 3780,260 3885,260 280,365 385,365 1155,365 1260,365 2030,365 2135,365 2905,365 3010,365 3780,365 3885,365 280,470 1155,470 2030,470 2905,470 3780,470 1090,565 1965,565 2840,565 3715,565 4590,565 280,575 1155,575 2030,575 2905,575 3780,575 280,670 1090,670 1155,670 1965,670 2030,670 2840,670 2905,670 3715,670 3780,670 4590,670 280,775 1090,775 1155,775 1965,775 2030,775 2840,775 2905,775 3715,775 3780,775 4590,775 280,880 1090,880 1155,880 1965,880 2030,880 2840,880 2905,880 3715,880 3780,880 4590,880 280,985 1090,985 1155,985 1965,985 2030,985 2840,985 2905,985 3715,985 3780,985 4590,985 280,1090 385,1090 985,1090 1090,1090 1155,1090 1260,1090 1860,1090 1965,1090 2030,1090 2135,1090 2735,1090 2840,1090 2905,1090 3010,1090 3610,1090 3715,1090 3780,1090 3885,1090 4485,1090 4590,1090 280,1195 385,1195 985,1195 1090,1195 1155,1195 1260,1195 1860,1195 1965,1195 2030,1195 2135,1195 2735,1195 2840,1195 2905,1195 3010,1195 3610,1195 3715,1195 3780,1195 3885,1195 4485,1195 4590,1195 280,1300 385,1300 985,1300 1090,1300 1155,1300 1260,1300 1860,1300 1965,1300 2030,1300 2135,1300 2735,1300 2840,1300 2905,1300 3010,1300 3610,1300 3715,1300 3780,1300 3885,1300 4485,1300 4590,1300 1840,2245 1005,3315 1075,3315 1145,3315 1215,3315 1404.5,3314.61 1474.5,3314.61 1544.5,3314.61 1614.5,3314.61 1804.5,3314.61 1874.5,3314.61 1944.5,3314.61 2014.5,3314.61 2204.5,3314.61 2274.5,3314.61 2344.5,3314.61 2414.5,3314.61 3215,3360 1005,3380 1075,3380 1145,3380 1215,3380 1404.5,3379.61 1474.5,3379.61 1544.5,3379.61 1614.5,3379.61 1804.5,3379.61 1874.5,3379.61 1944.5,3379.61 2014.5,3379.61 2204.5,3379.61 2274.5,3379.61 2344.5,3379.61 2414.5,3379.61 3250,3380 3215,3405 3250,3430 1005,3450 1075,3450 1145,3450 1215,3450 1404.5,3449.61 1474.5,3449.61 1544.5,3449.61 1614.5,3449.61 1804.5,3449.61 1874.5,3449.61 1944.5,3449.61 2014.5,3449.61 2204.5,3449.61 2274.5,3449.61 2344.5,3449.61 2414.5,3449.61
  other v3: 593.39,786.69 636.69,786.69 680,786.69 723.31,786.69 766.61,786.69 1468.39,786.69 1511.69,786.69 1555,786.69 1598.31,786.69 1641.61,786.69 2343.39,786.69 2386.69,786.69 2430,786.69 2473.31,786.69 2516.61,786.69 3218.39,786.69 3261.69,786.69 3305,786.69 3348.31,786.69 3391.61,786.69 4093.39,786.69 4136.69,786.69 4180,786.69 4223.31,786.69 4266.61,786.69 593.39,830 636.69,830 680,830 723.31,830 766.61,830 1468.39,830 1511.69,830 1555,830 1598.31,830 1641.61,830 2343.39,830 2386.69,830 2430,830 2473.31,830 2516.61,830 3218.39,830 3261.69,830 3305,830 3348.31,830 3391.61,830 4093.39,830 4136.69,830 4180,830 4223.31,830 4266.61,830 593.39,873.31 636.69,873.31 680,873.31 723.31,873.31 766.61,873.31 1468.39,873.31 1511.69,873.31 1555,873.31 1598.31,873.31 1641.61,873.31 2343.39,873.31 2386.69,873.31 2430,873.31 2473.31,873.31 2516.61,873.31 3218.39,873.31 3261.69,873.31 3305,873.31 3348.31,873.31 3391.61,873.31 4093.39,873.31 4136.69,873.31 4180,873.31 4223.31,873.31 4266.61,873.31
  other v5: 5340,2205 5345,2355
GPIO0_EXP: EXP0.7 U3.140 | length 3470.6
  Top Layer w8: U3.140@1905.35,2520.75 2114.25,2520.75 2207,2428 2207.4,2428 2240.4,2395 2928.07,2395 2955,2421.93 3251.86,2421.93 3269.78,2404 4554.2,2404 4894.2,2744 5064,2744 EXP0.7@5135,2815
GPIO1_EXP: EXP0.8 U3.139 | length 3524
  Top Layer w8: U3.139@1905.35,2501.06 2114.14,2501.06 2201.2,2414 2201.6,2414 2234.6,2381 2933.87,2381 2960.8,2407.93 3246.06,2407.93 3263.98,2390 4560,2390 4900,2730 5100,2730 EXP0.8@5185,2815
GPIO2_EXP: EXP0.14 U3.21 | length 4418.2
  Top Layer w8: U3.21@1440.79,2670.35 1440.79,2790.79 1596,2946 2005.61,2946 2396.61,2555 2870,2555 2892,2577 3166.8,2577 3197.3,2607.5 3337.91,2607.5 3368.41,2577 4489.61,2577 4635,2722.39 4635,2930.2 4717.8,3013 5037,3013 EXP0.14@5135,2915
GPIO3_EXP: EXP0.13 U3.22 | length 4498.8
  Top Layer w8: U3.22@1421.1,2670.35 1421.1,2791.1 1590,2960 2011.41,2960 2401.41,2570 2865,2570 2886,2591 3161,2591 3191.5,2621.5 3343.71,2621.5 3374.21,2591 4483.82,2591 4621,2728.18 4621,2936 4712,3027 5073,3027 EXP0.13@5185,2915
I2C_SCL: EXP0.3 U3.70 | length 4904.4
  Top Layer w8: U3.70@1074.65,1949.88 1114.88,1949.88 1145,1980 1200,1980 1222.5,2002.5 1222.5,2092.5 v1(1245,2115) ; v1(1900,1865) 1965,1865 1990,1840 v1(2195,1840) ; v1(2285,2455) 2303,2437 2910.68,2437 2937.6,2463.93 3269.25,2463.93 3287.18,2446 4536.8,2446 4876.8,2786 4906,2786 EXP0.3@4935,2815
  Bottom Layer w8: v1(1245,2115) 1260,2100 1699.71,2100 1831.96,1967.75 1831.96,1933.04 v1(1900,1865) ; v1(2195,1840) 2255,1840 2300,1885 2300,1925 2285,1940 v1(2285,2455)
I2C_SDA: EXP0.18 U3.9 | length 3811.1
  Top Layer w8: U3.9@1677.01,2670.35 1677.01,2707.01 1730,2760 1735,2760 v1(1770,2795) ; v1(2065,2795) 2085,2775 2097.42,2775 2377.42,2495 2889.48,2495 2915.48,2521 3189.99,2521 3220.49,2551.5 3314.72,2551.5 3345.22,2521 4512.81,2521 4691,2699.19 4691,2907.01 4740.99,2957 4893,2957 EXP0.18@4935,2915
  Bottom Layer w8: v1(1770,2795) v1(2065,2795)
INPUT_GND: C58.1 C59.1 U6.2 U6.8 USB.4 | length 264.8
  Top Layer w22: U6.8@515,3690.12 v2(515,3765) ; U6.2@815,3690.12 v2(815,3880)
KRESET: EXP0.5
MAX_ES1: C2_EndstopChannel1.1 MAX1_EndstopChannel1.1 R3_EndstopChannel1.2 U3.76 | length 3964.1
  Top Layer w8: v1(1140,1670) 1140,1715 1204.57,1779.57 U3.76@1204.57,1839.65 ; v1(3385,1565) 3415,1595 3415,1730 3350,1795 3350,2285 3370,2305 C2_EndstopChannel1.1@3402.44,2305 3402.44,2256.5 R3_EndstopChannel1.2@3400.94,2255 3400.94,2165.95 3385,2150 3385,1870 MAX1_EndstopChannel1.1@3430,1825
  Bottom Layer w8: v1(1140,1670) 1210,1600 1655,1600 1740,1515 2220.2,1515 2405.2,1700 3201.01,1700 3336.01,1565 v1(3385,1565)
MAX_ES2: C2_EndstopChannel2.1 MAX1_EndstopChannel2.1 R3_EndstopChannel2.2 U3.80 | length 4445.4
  Top Layer w8: v1(1260,1670) 1260,1755 1283.31,1778.31 U3.80@1283.31,1839.65 ; v1(4200,1675) 4200,2262.56 C2_EndstopChannel2.1@4240.94,2303.5 ; C2_EndstopChannel2.1@4242.44,2305 C2_EndstopChannel2.1@4240.94,2303.5 ; MAX1_EndstopChannel2.1@4270,1825 4225,1870 4225,2150 4240.94,2165.95 R3_EndstopChannel2.2@4240.94,2255 C2_EndstopChannel2.1@4240.94,2303.5
  Bottom Layer w8: v1(1260,1670) 1274,1656 1678.2,1656 1760.64,1573.56 2199.56,1573.56 2382.01,1756 3224.2,1756 3336.2,1644 4087.18,1644 4118.18,1675 v1(4200,1675)
MAX_ES3: C2_EndstopChannel3.1 MAX1_EndstopChannel3.1 R3_EndstopChannel3.2 U3.78 | length 4194.7
  Top Layer w8: v1(1200,1670) 1200,1735.4 1243.94,1779.34 U3.78@1243.94,1839.65 ; v1(3740,1585) 3770,1615 3770,2285 3790,2305 C2_EndstopChannel3.1@3822.44,2305 3820.94,2303.5 R3_EndstopChannel3.2@3820.94,2255 3820.94,2165.95 3805,2150 3805,1870 MAX1_EndstopChannel3.1@3850,1825
  Bottom Layer w8: v1(1200,1670) 1242,1628 1666.6,1628 1749.04,1545.56 2211.16,1545.56 2393.6,1728 3212.6,1728 3335.6,1605 3425,1605 3442.5,1587.5 v1@3742.5,1587.5
MIN_ES1: C1_EndstopChannel1.1 MIN1_EndstopChannel1.1 R2_EndstopChannel1.2 U3.77 | length 3882.9
  Top Layer w8: v1(1170,1700) 1170,1725.2 1224.25,1779.45 U3.77@1224.25,1839.65 ; v1(3625,1565) 3700,1640 3700,2263.03 C1_EndstopChannel1.1@3658.03,2305 3658.03,2256.97 3630,2228.94 MIN1_EndstopChannel1.1@3630,2065
  Bottom Layer w8: v1(1170,1700) 1170,1668.18 1224.18,1614 1660.8,1614 1743.24,1531.56 2216.96,1531.56 2399.4,1714 3206.8,1714 3329.8,1591 3414,1591 3440,1565 v1(3625,1565)
MIN_ES2: C1_EndstopChannel2.1 MIN1_EndstopChannel2.1 R2_EndstopChannel2.2 U3.81 | length 4413.5
  Top Layer w8: v1(1290,1700) 1290,1765 1302.99,1777.99 U3.81@1302.99,1839.65 ; MIN1_EndstopChannel2.1@4470,2065 4470,2228.94 4498.03,2256.97 C1_EndstopChannel2.1@4498.03,2305 4545,2258.03 v1(4545,1780)
  Bottom Layer w8: v1(1290,1700) 1320,1670 1683.99,1670 1766.44,1587.56 2193.77,1587.56 2376.21,1770 3230,1770 3340,1660 4083.38,1660 4153.38,1730 4495,1730 v1(4545,1780)
MIN_ES3: C1_EndstopChannel3.1 MIN1_EndstopChannel3.1 R2_EndstopChannel3.2 U3.79 | length 4212.8
  Top Layer w8: v1(1230,1700) 1230,1745.6 1263.62,1779.23 U3.79@1263.62,1839.65 ; MIN1_EndstopChannel3.1@4050,2065 4050,2228.94 4078.03,2256.97 C1_EndstopChannel3.1@4078.03,2305 4110,2305 4140,2275 4140,1665 v1(4105,1630)
  Bottom Layer w8: v1(1230,1700) 1230,1668.18 1256.18,1642 1672.4,1642 1754.84,1559.56 2205.36,1559.56 2387.8,1742 3218.4,1742 3330.4,1630 v1(4105,1630)
MISO: EXP0.19 U3.108 U4_ThermocoupleChannel1.7 U4_ThermocoupleChannel2.7 U10.11 | length 5452.2
  Top Layer w8: U3.108@1834.49,1839.65 1965.35,1839.65 1985,1820 2165,1820 v1(2185,1800) ; v1(2320,2520) 2333,2507 2345.62,2507 2371.62,2481 2374,2481 2375,2480 2894.28,2480 2921.28,2507 3212,2507 3242.5,2537.5 3308.92,2537.5 3335.5,2510.92 3335.5,2510.71 3339.21,2507 4518.61,2507 4705,2693.39 4705,2901.21 4746.79,2943 4857,2943 EXP0.19@4885,2915 ; U10.11@3199.57,2734.17 3199.57,2784.57 v1(3245,2830) 3265,2830 3275,2840 3560,2840 3590,2870 U4_ThermocoupleChannel1.7@3590,2914.49 v2(3590,2985) ; v1(3590,3225) U4_ThermocoupleChannel2.7@3590,3299.49
  Bottom Layer w8: v1(2185,1800) 2197.5,1787.5 2247.5,1787.5 2275,1815 2312.39,1815 2355,1857.61 2355,2485 v1(2320,2520) ; v1(3225,2520) 3225,2550 3271,2596 3271,2797.18 3245,2823.18 v1(3245,2830) ; v2(3590,2985) 3580,2985 3565,3000 3565,3200 v1(3590,3225)
MOD0E1: U3.84 U7_DriverChannelDRV88251.24 | length 1464.2
  Top Layer w8: U7_DriverChannelDRV88251.24@616.02,942.2 616.02,1181.43 846.6,1412 1286.6,1412 1362.05,1487.45 U3.84@1362.05,1839.65
MOD0E2: U3.91 U7_DriverChannelDRV88252.24 | length 901.1
  Top Layer w8: U7_DriverChannelDRV88252.24@1491.02,942.2 1491.02,1341.02 1499.84,1349.84 U3.91@1499.84,1839.65
MOD0E3: U3.98 U7_DriverChannelDRV88253.24 | length 1521.4
  Top Layer w8: U3.98@1637.64,1839.65 1637.64,1641.96 1638,1641.6 1638,1462.6 1726.6,1374 2276.8,1374 2366.02,1284.78 U7_DriverChannelDRV88253.24@2366.02,942.2